# Altium PCB F_300.PcbDoc (part 3 of 3)
Units mil, origin at the board's own origin, x right, y up, seen from the top; angles counter-clockwise.
Board outline 3770 x 3800 mil, 4 copper layers (Top Layer, DGND, VCC, Bottom Layer), stack 30.634 mil thick; 207 components, 290 nets, 1124 pads, 648 vias.
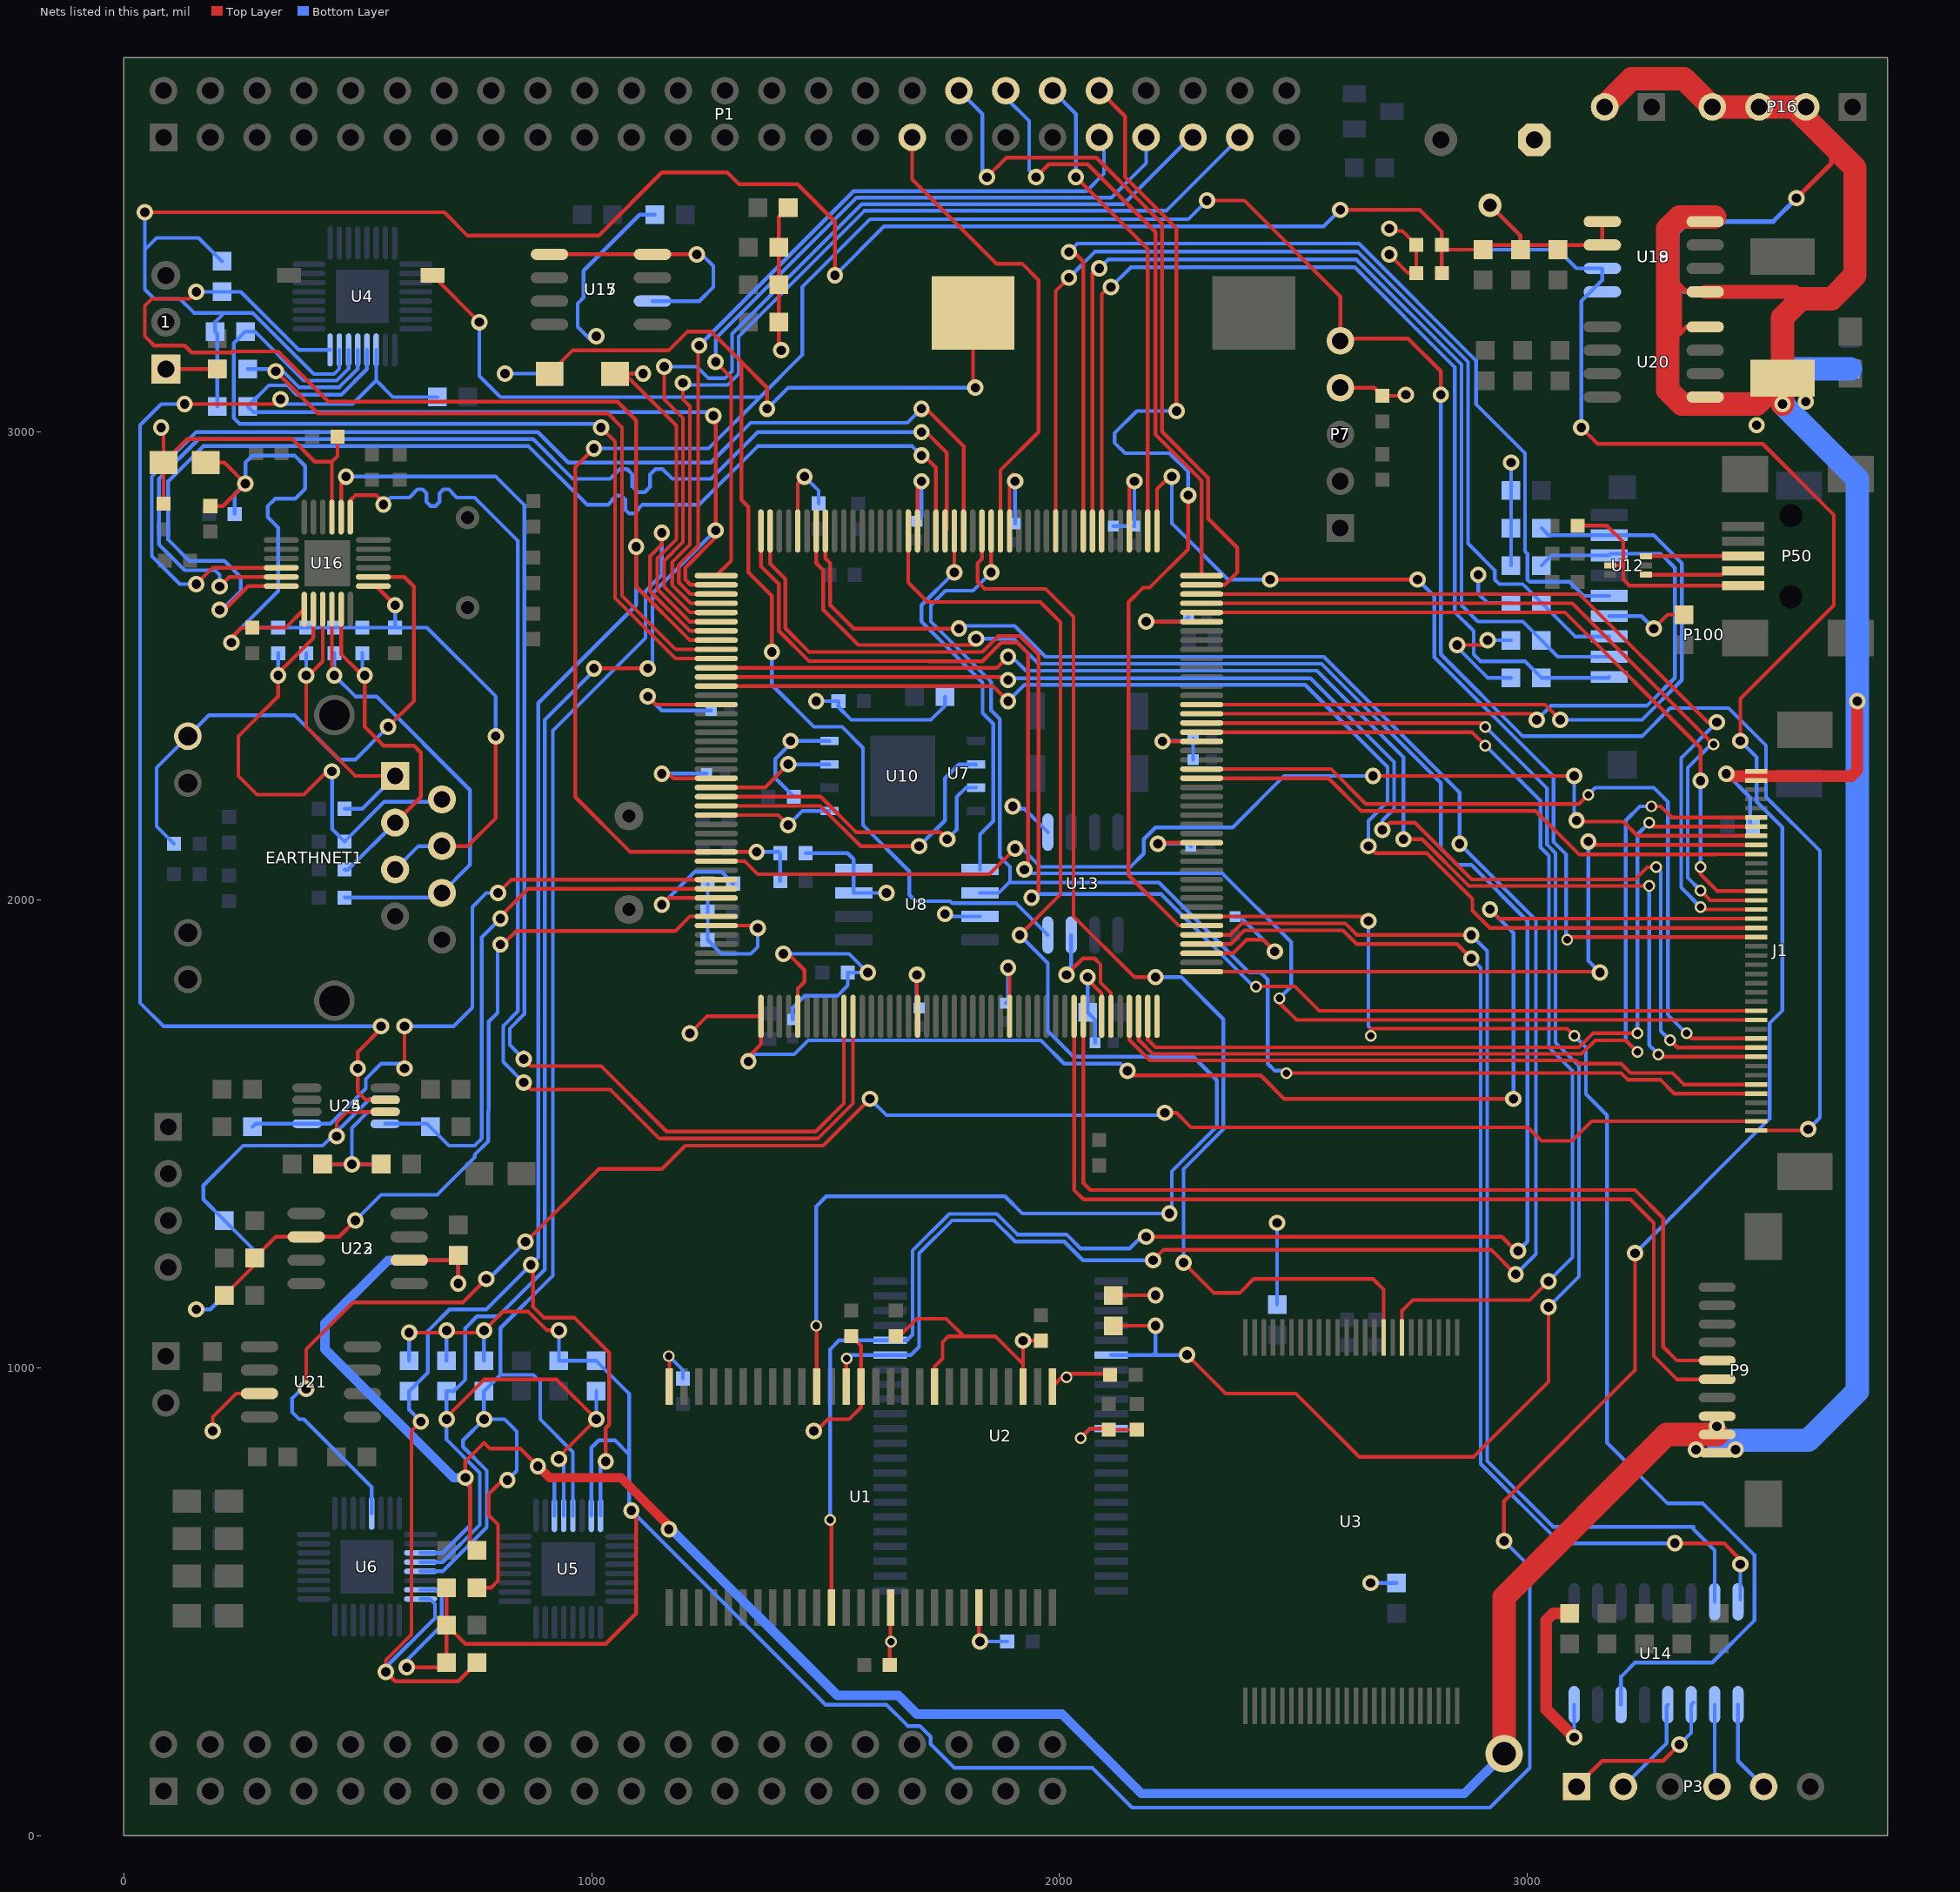
[diagram p5: the nets of this part, all layers, seen from the top]

## Via types
v1: diameter 35, hole 20, Top Layer to Bottom Layer, 496 vias
v2: diameter 25, hole 16, Top Layer to Bottom Layer, 109 vias
v3: diameter 19.68, hole 7.87, Top Layer to Bottom Layer, 31 vias
v4: diameter 120, hole 120, Top Layer to Bottom Layer, 5 vias
v5: diameter 50, hole 28, Top Layer to Bottom Layer, 3 vias
v6: diameter 110, hole 110, Top Layer to Bottom Layer, 2 vias
v7: diameter 38, hole 28, Top Layer to Bottom Layer, 1 vias
v8: diameter 80, hole 50, Top Layer to Bottom Layer, 1 vias

## Nets (pads, with @x,y where several pads share a name; then routed paths per layer and width w, separated by ;. In a path a pad name is that pad's centre, name@x,y a point inside that pad or via, vN(x,y) a via of type N, cw(c..) or ccw(c..) an arc to the next point about the centre after c; other vN are vias at no path point) (continued)
PB10: P9.5 U7.79 | length 2080.2
  Top Layer w8: U7.79@2031.06,1751.3 2031.06,1380 2051.06,1360 3220,1360 3270,1310 3270,1025 3319.5,975.5 P9.5@3405.5,975.5
PB11: P9.6 U7.80 | length 2029.3
  Top Layer w8: U7.80@2050.75,1751.3 2050.75,1395 2065.75,1380 3230,1380 3290,1320 3290,1045 3319.5,1015.5 P9.6@3405.5,1015.5
PB12: U7.92 U14.8 | length 2443.5
  Top Layer w8: U7.92@2303.7,1905.83 2365.83,1905.83 2395,1935 2605.83,1935 2635,1905.83 2849.17,1905.83 v1(2880,1875) ; v1(3315,625) 3420,625 3450,595 3450,580 v1(3455,580)
  Bottom Layer w8: v1(2880,1875) 2900,1855 2900,795 3070,625 v1(3315,625) v1@3305,635 ; U14.8@3455,505 v1(3455,580)
PB13: U7.93 U14.7 | length 2407.7
  Top Layer w8: U7.93@2303.7,1925.51 2365,1925.51 2389.49,1950 2610.63,1950 2635.11,1925.51 v1@2880,1925.51
  Bottom Layer w8: v1(2880,1925) 2914,1891 2914,801 3055,660 3355,660 ; 3355,655 3400,610 U14.7@3400,500
PB14: P1.42 U7.94 | length 2184.2
  Top Layer w8: P1.42@2085,3730 2140,3675 2140,3545 2250,3435 v1(2250,3045) ; 2255,1945.2 2147.5,2052.7 2147.5,2636.39 2178.61,2667.5 2192.5,2667.5 2275,2750 v1(2275,2865)
  Bottom Layer w8: v1(2250,3045) 2165,3045 2117.5,2997.5 2117.5,2977.5 2140,2955 2235,2955 2275,2915 v1(2275,2865)
PB15: U7.95 U14.14 | length 2885
  Top Layer w8: U7.95@2303.7,1964.88 2650.12,1964.88 v1(2660,1955) ; 2665,1725 3085,1725 v2(3100,1710)
  Bottom Layer w8: v1(2660,1955) 2660,1730 2665,1725 ; v2(3100,1710) v2@3103.11,1706.89 ; v2@3103.12,1709.97 v2@3103.11,1706.89 ; U14.14@3200,280 3200,340 3230,370 3395.2,370 3485,459.8 3485,600 3375,710 3300,710 3170,840 3170,1540 3125,1585 3125,1685 v2@3103.11,1706.89
  other v2: 2665,1710
PC0: J1.8 U7.32 | length 2472.3
  Top Layer w8: U7.32@1266.3,2082.99 1327.01,2082.99 1355,2055 1850,2055 v1(1905,2110) ; v1(2670,2265) v1@3105,2265 ; v1(3105,2170) 3107.5,2167.5 3204.7,2167.5 3235,2137.2 J1.8@3489,2137.2
  Bottom Layer w8: v1(1905,2110) 1920,2110 1959,2071 2151.8,2071 2180,2099.2 2180,2130 2205,2155 2370,2155 2480,2265 v1(2670,2265) ; v1@3100,2255 3100,2175 v1(3105,2170)
  other v1: 3100,2265
PC2: R81.2 U7.34 U24.5 | length 1421.9
  Top Layer w8: v1(600,1640) v1(600,1730) ; v1(800,2015) 828.62,2043.62 U7.34@1266.3,2043.62
  Bottom Layer w8: R81.2@275,1515 281.61,1521.61 U24.5@391.34,1521.61 441.61,1521.61 517.17,1597.17 517.17,1617.17 550,1650 605,1650 600,1645 v1(600,1640) ; v1(600,1730) 705,1730 745,1770 745,1985 775,2015 v1(800,2015)
PC3: R80.1 U7.35 U24.4 | length 1209.1
  Top Layer w8: v1(805,1960) 805,1965 863.94,2023.94 U7.35@1266.3,2023.94
  Bottom Layer w8: U24.4@558.66,1521.61 648.39,1521.61 R80.1@655,1515 695,1475 750,1475 765,1490 765,1920 v1(805,1960)
PC4: U7.54 U16.8 | length 2680.4
  Top Layer w8: U16.8@464.53,2818.43 464.53,2889.53 475,2900 v1(475,2905) ; v1(855,1660) 870,1645 1020.2,1645 1160,1505.2 1478.89,1505.2 1538.94,1565.25 U7.54@1538.94,1751.3
  Bottom Layer w8: v1(475,2905) 795,2905 856,2844 856,1756 825,1725 825,1690 v1(855,1660) v1@855,1675
PC5: U7.55 U16.7 | length 2680.4
  Top Layer w8: U16.7@484.21,2818.43 484.21,2854.21 495,2865 540,2865 555,2850 v1(555,2845) ; v1(855,1610) 870,1595 1040,1595 1145,1490 1483.49,1490 1558.62,1565.13 U7.55@1558.62,1751.3
  Bottom Layer w8: v1(555,2845) 570,2860 605,2860 610.6,2860 619,2868.4 619,2869.36 627.4,2877.76 638.6,2877.76 647,2869.36 647,2860 647,2850.64 655.4,2842.24 666.6,2842.24 675,2850.64 675,2860 675,2869.36 683.4,2877.76 694.6,2877.76 703,2869.36 703,2868.4 711.4,2860 750,2860 842,2768 842,1761.8 811,1730.8 811,1654 v1(855,1610)
PC6: U3.7 U7.115 | length 2257.4
  Top Layer w8: U7.115@2303.7,2358.58 2881.42,2358.58 v2(2910,2330) ; U3.7@2731.89,1065 2731.89,1121.89 2755,1145 3005,1145 v1(3045,1185)
  Bottom Layer w8: v2(2910,2330) 3028,2212 3028,2112.4 3046,2094.4 3046,1685 3096,1635 3096,1236 v1(3045,1185)
PC7: R1.1 U2.6 U7.116 | length 3365
  Top Layer w8: R1.1@2115,1090 v1(2205,1090) ; v1(2272.54,1027.54) 2355.09,945 2505,945 2640,810 2885,810 3045,970 v1(3045,1130) ; U7.116@2303.7,2378.27 2901.73,2378.27 v2(2910,2370)
  Bottom Layer w8: U2.6@2110.35,1027.54 2200,1027.54 ; v1(2205,1090) 2205,1032.54 2200,1027.54 ; v1(2272.54,1027.54) 2200,1027.54 ; v2(2910,2370) 3042,2238 3042,2118.2 3060,2100.2 3060,1695 3110,1645 3110,1195 v1(3045,1130)
PC8: P100.7 R43.1 U7.117 | length 1596.9
  Top Layer w8: U7.117@2303.7,2397.95 3007.05,2397.95 v1(3020,2385)
  Bottom Layer w8: v1(3020,2385) 3050,2415 3255.2,2415 3315.1,2474.9 3315.1,2709.9 3285,2740 3178.47,2740 P100.7@3175,2736.53 3051.54,2736.53 R43.1@3030,2715
PC9: P100.8 R44.1 U7.118 | length 1656.1
  Top Layer w8: U7.118@2303.7,2417.64 3037.36,2417.64 v1(3070,2385)
  Bottom Layer w8: R44.1@3030,2795 3045.16,2779.84 P100.8@3175,2779.84 3270.16,2779.84 3330,2720 3330,2470 3245,2385 v1(3070,2385)
PC10: P100.1 R39.2 U7.139 | length 2322.3
  Top Layer w8: U7.139@2090.12,2788.7 2090.12,3295.12 2110,3315 v1(2110,3310)
  Bottom Layer w8: v1(2110,3310) 2152.5,3352.5 2631.1,3352.5 2844.5,3139.1 2844.5,2615.5 2885,2575 2885,2525 2900,2510 2995,2510 R39.2@3030,2475 3173.31,2475 P100.1@3175,2476.69
PC11: P100.2 R38.2 U7.140 | length 2321.1
  Top Layer w8: U7.140@2070.43,2788.7 2070.43,3340.43 2080,3350 v1(2085,3350)
  Bottom Layer w8: v1(2085,3350) 2104,3369 2634.4,3369 2859,3144.4 2859,2630 2894,2595 2990,2595 R38.2@3030,2555 3065,2520 P100.2@3175,2520
PC12: P100.5 U7.141 | length 2313.1
  Top Layer w8: v1(2020,3385) 2020,3395 2050.75,3364.25 U7.141@2050.75,2788.7
  Bottom Layer w8: v1(2020,3385) 2038,3403 2640,3403 2890,3153 2890,3060 2995,2955 2995,2745 3000,2740 3000,2685 3005,2680 3090,2680 3120.08,2649.92 P100.5@3175,2649.92
PC13: R10.1 R11.1 R21.1 U4.32 U5.32 U6.32 U7.8 | length 6008.3
  Top Layer w8: v1(155,3300) 140,3285 60,3285 45,3270 45,3205 65,3185 130,3185 145,3170 170,3170 230,3170 232.5,3172.5 330,3172.5 437.5,3065 1055,3065 1095,3025 v1(1095,2755) 1095.09,2754.91 1095.09,2670 1209.66,2555.43 U7.8@1266.3,2555.43 ; v1(635,885) 615,865 615,430 560,375 v1(560,350) 580,330 715,330 R21.1@755,370 ; v1@875,1220 875,1130 897.5,1107.5 962.5,1107.5 1037.5,1032.5 1037.5,878.61 1030,871.11 v1(1030,800)
  Bottom Layer w8: v1(155,3300) R10.1@210,3300 250,3300 374.25,3175.75 U4.32@441.02,3175.75 ; v1@555,355 665,465 665,495 653.98,506.02 U6.32@634.25,506.02 ; v1(635,885) 610,910 R11.1@610,950 650,990 650,1078.89 696.11,1125 775,1125 v1(870,1220) 886,1236 886,2421 1095,2630 v1(1095,2755) ; U5.32@1018.98,684.25 1018.98,788.98 v1(1030,800)
PC14: R4.1 U4.29 U7.9 | length 1706.2
  Top Layer w8: v1(325,3130) 415,3040 1035,3040 1065,3010 1065,2650.2 1179.45,2535.75 U7.9@1266.3,2535.75
  Bottom Layer w8: R4.1@265,3135 335,3135 374,3096 460.8,3096 500.08,3135.28 U4.29@500.08,3175.75
PC15: R5.1 U4.30 U7.10 | length 1959.7
  Top Layer w8: v1(1020,3010) 1050,2980 1050,2645.4 1179.34,2516.06 U7.10@1266.3,2516.06
  Bottom Layer w8: U4.30@480.39,3175.75 480.39,3135.39 455,3110 385,3110 280,3215 R5.1@260,3215 235,3190 235,3030 247.5,3017.5 v1@1032.5,3017.5
PD2: P100.3 R37.2 U7.144 | length 2310.8
  Top Layer w8: U7.144@1991.69,2788.7 1991.69,3301.69 v1(2020,3330)
  Bottom Layer w8: v1(2020,3330) 2075.6,3385.6 2637.6,3385.6 2873,3150.2 2873,2762 2930,2705 2930,2685 2940,2675 2990,2675 R37.2@3030,2635 3101.69,2563.31 P100.3@3175,2563.31
PD6: P1.33 U7.150 | length 1019.1
  Top Layer w8: P1.33@1685,3630 1685,3540 1865,3360 1920,3360 1955,3325 1955,3000 1873.58,2918.58 U7.150@1873.58,2788.7
PD7: J1.36 U7.151 U8.2 | length 2869.6
  Top Layer w8: v1(1853.9,2700) U7.151@1853.9,2788.7 ; v2(2485,1630) 3200.4,1630 3214.4,1616 3284,1616 3313.98,1586.02 J1.36@3489,1586.02
  Bottom Layer w8: U8.2@1830,2014.94 1869.94,2014.94 1894,2039 ; v1(1853.9,2700) 1815,2661.1 1756.1,2661.1 1725,2630 1725,2595 1853.9,2466.1 1853.9,2405.1 1872.5,2386.5 1872.5,2092.5 1894,2071 1894,2039 ; v2(2485,1630) 2480,1635 2460,1635 2445,1650 2445,1830 2430,1845 2405,1845 2212.5,2037.5 1895.5,2037.5 1894,2039
PE0: U1.15 U2.39 U7.169 | length 4599.8
  Top Layer w8: U7.169@1499.57,2788.7 1499.57,2730.43 1510,2720 1510,2630 1560,2580 v1(1785,2580) ; U1.15@1544.05,960 1544.05,1024.05 1545,1025 v2(1545,1020) ; v1(2200,1230) 2222.5,1252.5 2922.5,1252.5 v1(2975,1200)
  Bottom Layer w8: v2(1545,1020) 1552.54,1027.54 U2.39@1637.91,1027.54 1682.54,1027.54 1700,1045 1700,1244.8 1770.2,1315 1860,1315 1905,1270 2010,1270 2050,1230 v1(2200,1230) ; v1(1785,2580) 1791.01,2586.01 1903.99,2586.01 1970,2520 2564.8,2520 2855,2229.8 v1(2855,2120) 3018,1957 3018,1243 v1(2975,1200)
PE1: U1.39 U2.40 U7.170 | length 5056
  Top Layer w8: U7.170@1479.88,2788.7 1479.88,2720.12 1495,2705 1495,2620 1570,2545 v1@1815,2545 ; v2(1510,675) 1512.56,672.44 U1.39@1512.56,487.56 ; v1(2185,1280) 2945,1280 2975,1250 v1(2980,1250)
  Bottom Layer w8: v2(1510,675) 1510,1040 1529.04,1059.04 U2.40@1637.91,1059.04 1674.04,1059.04 1686,1071 1686,1250.6 1764.4,1329 1866,1329 1910,1285 2014.8,1285 2044.8,1255 2150,1255 2180,1285 v1(2185,1280) ; v1(1821.49,2558.51) 1901.49,2558.51 1955,2505 2560,2505 2815,2250 2815,2110 2850,2075 2880.2,2075 3000.1,1955.1 3000.1,1270.1 v1(2980,1250)
PE2: P1.43 U7.1 | length 1664
  Top Layer w8: v1(1265,3150) 1298.07,3116.93 1298.07,2725 U7.1@1266.3,2693.23
  Bottom Layer w8: v1(1265,3150) 1265,3200 1566,3501 2111,3501 2185,3575 P1.43@2185,3630
PE3: R12.1 R13.2 R22.1 U4.28 U5.28 U6.28 U7.2 | length 5158.6
  Top Layer w8: v1(690,890) 690,895 770,975 925,975 v1(1010,890) 930,810 v1(930,805) ; v1(1005,2495) v1(1120,2495) ; v1(1260,3035) 1265,3030 v1(1265,2790) 1265,2775 1200,2710 1200,2685 1211.46,2673.54 U7.2@1266.3,2673.54
  Bottom Layer w8: U4.28@519.76,3175.75 519.76,3134.76 465,3080 370,3080 350,3100 310,3100 R13.2@265,3055 277.5,3042.5 1252.5,3042.5 v1(1260,3035) ; U6.28@634.25,584.76 681.57,584.76 760.91,664.1 760.91,775.41 690,846.31 v1(690,890) R12.1@690,950 705,950 730,975 730,1085 755,1110 800,1110 900,1210 900,2385 1007.5,2492.5 v1(1005,2495) ; v1(930,805) 940.24,794.76 U5.28@940.24,684.25 ; v1(1010,890) 1010,895 R22.1@1010,950 ; v1(1120,2495) 1130,2495 1130,2655 v1(1265,2790)
PE4: P1.41 U7.3 | length 1723.7
  Top Layer w8: v1(1230,3185) 1230,3190 1227.6,3187.6 1227.6,2757.4 1186,2715.8 1186,2679.2 1211.34,2653.86 U7.3@1266.3,2653.86
  Bottom Layer w8: v1(1230,3185) 1560,3515 2057.5,3515 2095,3552.5 2095,3620 P1.41@2085,3630
PE5: P1.47 U7.4 | length 2021.7
  Top Layer w8: v1(1195,3105) 1195,3070 1210,3055 1210,2759.6 1172,2721.6 1172,2673.4 1211.23,2634.17 U7.4@1266.3,2634.17
  Bottom Layer w8: v1(1195,3105) 1199,3101 1290.8,3101 1314,3124.2 1314,3204.2 1582.8,3473 2228,3473 P1.47@2385,3630
PE6: P1.45 U7.5 | length 2038.3
  Top Layer w8: v1(1155,3140) 1155,3070 1195,3030 1195,2765 1155,2725 1155,2669.49 1210,2614.49 U7.5@1266.3,2614.49
  Bottom Layer w8: v1(1155,3140) 1225,3140 1250,3115 1285,3115 1300,3130 1300,3210 1577,3487 2136.6,3487 2279.6,3630 P1.45@2285,3630
PG6: J1.10 U7.110 | length 1252.8
  Top Layer w8: U7.110@2303.7,2260.16 2575,2260.16 2645.16,2190 3017.5,2190 3110,2097.5 3404.67,2097.5 3405,2097.83 J1.10@3489,2097.83
PG7: J1.30 U7.111 | length 1719.3
  Top Layer w8: U7.111@2303.7,2279.84 2580,2279.84 2654.84,2205 3110,2205 v2(3130,2225) ; v2(3340,1715) 3350.87,1704.13 J1.30@3489,1704.13
  Bottom Layer w8: v2(3130,2225) 3145,2240 3270,2240 3300,2210 3300,1755 v2(3340,1715)
PG9: U3.9 U7.152 | length 2533.9
  Top Layer w8: U7.152@1834.21,2788.7 1834.21,2729.21 1825,2720 1825,2680 1840,2665 1970.2,2665 2030,2605.2 2030,1965 2160,1835 v1(2205,1835) ; v1(2265,1225) 2330,1160 2385,1160 2415,1190 2670,1190 2692.52,1167.48 U3.9@2692.52,1065
  Bottom Layer w8: v1(2205,1835) 2260.2,1835 2350.1,1745.1 2350.1,1510.1 2265,1425 v1(2265,1225)
PG11: U7.154 U16.16 | length 2553.4
  Top Layer w8: v1(155,2675) 190.16,2710.16 U16.16@336.57,2710.16 ; v1(1705,3050) 1710,3055 1794.84,2970.16 U7.154@1794.84,2788.7
  Bottom Layer w8: v1(155,2675) 120,2675 60,2735 60,2905 155,3000 885,3000 950,2935 1255,2935 1340,3020 1675,3020 v1(1705,3050)
PG12: U7.155 U8.1 | length 833.1
  Top Layer w8: v1@1775.16,2695 U7.155@1775.16,2788.7
  Bottom Layer w8: v1(1775,2700) 1705,2630 1705,2595 1835.5,2464.5 1835.5,2399.5 1858.5,2376.5 1858.5,2168.5 1830,2140 U8.1@1830,2065
PG13: U7.156 U16.17 | length 2548
  Top Layer w8: v1(205,2670) 225.47,2690.47 U16.17@336.57,2690.47 ; v1(1705,3000) 1705,3010 1710,3005 1759,2956 1759,2792.23 U7.156@1755.47,2788.7
  Bottom Layer w8: v1(205,2670) 205,2695 195,2705 130,2705 75,2760 75,2900 160,2985 875,2985 960,2900 1039.4,2900 1060.4,2921 1075.6,2921 1087,2909.6 1087,2883.2 1098.4,2871.8 1113.6,2871.8 1125,2883.2 1125,2909.6 1136.4,2921 1151.6,2921 1172.6,2900 1255,2900 1355,3000 v1(1705,3000)
PG14: U7.157 U16.18 | length 2548
  Top Layer w8: v1(205,2620) 205,2615 210,2615 265.79,2670.79 U16.18@336.57,2670.79 ; v1(1705,2950) 1710,2950 1735.79,2924.21 U7.157@1735.79,2788.7
  Bottom Layer w8: v1(205,2620) 205,2615 250,2660 250,2690 215,2725 140,2725 95,2770 95,2895 170,2970 865,2970 990,2845 1035.6,2845 1044,2853.4 1044,2855.65 1052.4,2864.05 1063.6,2864.05 1072,2855.65 1072,2834.35 1080.4,2825.95 1091.6,2825.95 1100,2834.35 1100,2836.6 1108.4,2845 1230,2845 1355,2970 1685,2970 v1(1705,2950)
PG15: U1.17 U7.160 | length 3301.2
  Top Layer w8: v2(1480,1090) 1481.06,1088.94 U1.17@1481.06,960 ; U7.160@1676.73,2788.7 1676.73,2678.27 1718,2637 1958.6,2637 2002,2593.6 2002,2012 v1(1915,1925)
  Bottom Layer w8: v2(1480,1090) 1480,1345 1501.5,1366.5 1883.5,1366.5 1920,1330 v1(2235,1330) 2240,1335 2240,1419.8 2336.1,1515.9 2336.1,1615 2286.1,1665 2030,1665 1975,1720 1975,1865 v1(1915,1925)
PH4: J1.17 U7.45 | length 3003.8
  Top Layer w8: v1(1210,1715) 1246.3,1751.3 U7.45@1361.77,1751.3 1361.77,1691.77 1325,1655 v1(1335,1655) ; v1(2145,1635) 2155,1625 2430,1625 2480,1575 v1(2970,1575) ; v1(2920,1980) 2940,1960 2985,1960 2985.04,1960.04 J1.17@3489,1960.04
  Bottom Layer w8: v1@1340,1650 v1(1335,1655) 1350,1670 1432.76,1670 1462.76,1700 1960,1700 2010,1650 2130,1650 v1(2145,1635) ; v1(2920,1980) 2970,1930 v1(2970,1575)
PH6: U7.83 U13.7 | length 301.8
  Top Layer w8: v1(2015,1840) 2050,1875 2075,1875 2087.5,1862.5 2087.5,1823.61 2109.8,1801.31 U7.83@2109.8,1751.3
  Bottom Layer w8: v1(2015,1840) 2015,1850 2025,1860 U13.7@2025,1925
PH8: J1.35 U7.85 | length 1429.7
  Top Layer w8: U7.85@2149.17,1751.3 2149.17,1700.83 2193,1657 3103,1657 3110,1650 3200.2,1650 3220.2,1630 3310,1630 3334.29,1605.71 J1.35@3489,1605.71
PH9: J1.6 U7.86 | length 1957.5
  Top Layer w8: U7.86@2168.86,1751.3 2168.86,1701.34 2199.2,1671 3115.8,1671 3144.8,1700 3210,1700 v2(3235,1675) ; v2(3265,2200) 3285,2200 3308.43,2176.57 J1.6@3489,2176.57
  Bottom Layer w8: v2(3235,1675) 3210,1700 3210,2170 3240,2200 v2(3265,2200)
PH10: J1.7 U7.87 | length 1808.3
  Top Layer w8: U7.87@2188.54,1751.3 2188.54,1701.46 2205,1685 3110,1685 3140,1715 v2(3235,1715) ; v2(3260,2165) 3268.11,2156.89 J1.7@3489,2156.89
  Bottom Layer w8: v2(3235,1715) 3235,2140 v2(3260,2165)
PH11: U7.88
PH12: J1.9 U7.89 | length 1504.5
  Top Layer w8: U7.89@2303.7,1846.77 3153.23,1846.77 v1(3155,1845) ; v1(3130,2125) 3137.48,2117.52 J1.9@3489,2117.52
  Bottom Layer w8: v1(3130,2125) 3130,1870 v1(3155,1845)
PH13: J1.14 U7.128 | length 1590.1
  Top Layer w8: U7.128@2303.7,2614.49 3080.51,2614.49 3370,2325 v1(3370,2255) ; v2(3370,2070) 3370,2055 3405.91,2019.09 J1.14@3489,2019.09
  Bottom Layer w8: v2(3370,2070) v1(3370,2255)
PH14: J1.15 U7.129 | length 1695.9
  Top Layer w8: U7.129@2303.7,2634.17 3095.83,2634.17 v2(3397.5,2332.5) ; v2(3370,2020) 3390.59,1999.41 J1.15@3489,1999.41
  Bottom Layer w8: v2(3370,2020) 3342.5,2047.5 3342.5,2282.5 3392.5,2332.5 v2(3397.5,2332.5)
PH15: J1.16 U7.130 | length 1783.3
  Top Layer w8: U7.130@2303.7,2653.86 3111.14,2653.86 3385,2380 v1(3405,2380) ; v2(3370,1985) 3375.28,1979.72 J1.16@3489,1979.72
  Bottom Layer w8: v2(3370,1985) 3328.5,2026.5 3328.5,2303.5 v1(3405,2380) ; v1@3402.5,2382.5 v1@3405,2385
PI0: P1.36 U7.131 | length 1559.2
  Top Layer w8: v1(1845,3545) 1886.5,3586.5 2078.5,3586.5 2219,3446 2219,3000.8 2317.7,2902.1 2317.7,2815 2380,2752.7 2380,2700 2353.54,2673.54 U7.131@2303.7,2673.54
  Bottom Layer w8: P1.36@1785,3730 1835,3680 1835,3555 v1(1845,3545)
PI1: P1.38 U7.132 | length 1313.5
  Top Layer w8: v1(1950,3545) 1977.5,3572.5 2060,3572.5 2205,3427.5 2205,2995 2303.7,2896.3 U7.132@2303.7,2693.23
  Bottom Layer w8: P1.38@1885,3730 1885,3715 1935,3665 1935,3560 v1(1950,3545)
PI2: J1.19 U7.133 | length 2113.6
  Top Layer w8: U7.133@2208.23,2788.7 2208.23,2878.23 2235,2905 v1(2240,2905) ; v1(2450,2685) v1(2765,2685) ; v2@3085,1920.67 J1.19@3489,1920.67
  Bottom Layer w8: v1(2240,2905) 2240,2805 2360,2685 v1(2450,2685) ; v1(2765,2685) 2801,2649 2801,2519 3056,2264 3056,2124 3082.5,2097.5 3082.5,1917.5 v2(3085,1915)
PI3: P1.40 U7.134 | length 1025.6
  Top Layer w8: v1(2035,3545) 2188.54,3391.46 U7.134@2188.54,2788.7
  Bottom Layer w8: P1.40@1985,3730 2035,3680 v1(2035,3545)
PI6: J1.27 U7.175 | length 2995.2
  Top Layer w8: U7.175@1381.46,2788.7 1381.46,2718.54 1414,2686 1414,2580.8 1464.8,2530 1835.2,2530 1869.2,2564 1916,2564 1955,2525 1955,2020 v1(1940,2005) ; v2(2420,1815) 2503.19,1815 2555,1763.19 J1.27@3489,1763.19
  Bottom Layer w8: v1(1940,2005) 1947.5,2012.5 2217.3,2012.5 2414.8,1815 v2(2420,1815)
PI7: J1.28 U7.176 | length 3089.1
  Top Layer w8: U7.176@1361.77,2788.7 1361.77,2713.23 1400,2675 1400,2575 1464.62,2510.38 1720.8,2510.38 1721.18,2510 1835,2510 1875,2550 1910,2550 1932.5,2527.5 1932.5,2072.5 v1(1925,2065) ; v2(2470,1790) 2470,1780 2506.5,1743.5 J1.28@3489,1743.5
  Bottom Layer w8: v1(1925,2065) 1933,2057 2348,2057 2495,1910 2495,1815 v2(2470,1790)
PI8: R7.1 R14.1 U5.29 U6.29 U7.7 | length 3715.5
  Top Layer w8: R14.1@755,530 785,530 800,545 800,665 780,685 780,730 815,765 v1(820,760) ; v1(1150,2785) 1150,2759.6 1125.4,2735 1125,2735 1125,2659.89 1209.77,2575.12 U7.7@1266.3,2575.12
  Bottom Layer w8: U6.29@634.25,565.08 681.69,565.08 775.8,659.2 775.8,780.3 725,831.11 725,845 v1(770,890) ; v1(820,760) 840,780 840,863.89 813.89,890 v1(770,890) ; U5.29@959.92,684.25 959.92,820.08 890,890 890,970 875,985 805,985 ; v1(1150,2785) 1150,2695 1115,2660 1115,2560 917,2362 917,1197 805,1085 805,985 ; v1(770,890) R7.1@770,950 805,985
PI9: J1.32 U7.11 | length 2886.6
  Top Layer w8: U7.11@1266.3,2496.38 1680,2496.38 1680.38,2496 1866,2496 v1(1890,2520) ; v1(2735,2130) 2775,2130 2875,2030 v2(3260,2030) ; v2@3280,1664.76 J1.32@3489,1664.76
  Bottom Layer w8: v1(1890,2520) 1898,2520 1928,2490 2550,2490 2735,2305 v1(2735,2130) ; v2(3260,2030) 3260,1690 v2(3280,1670)
PI10: J1.31 U7.12 | length 2913.6
  Top Layer w8: U7.12@1266.3,2476.69 1883.31,2476.69 v1(1890,2470) ; v1@2690,2144 v1(2690,2150) 2705,2165 2760,2165 2881,2044 3230,2044 3256,2070 v2(3275,2070) ; v2(3305,1700) 3320.55,1684.45 J1.31@3489,1684.45
  Bottom Layer w8: v1(1890,2470) 1894,2474 2536,2474 2715,2295 2715,2195 2690,2170 v1(2690,2150) ; v2(3275,2070) 3285,2060 3285,1720 v2(3305,1700)
PI11: J1.18 U7.13 | length 2637.9
  Top Layer w8: U7.13@1266.3,2457.01 1857.99,2457.01 v1(1890,2425) ; v1(2660,2115) 2675,2100 2785,2100 2882.5,2002.5 2882.5,1977.5 2919.65,1940.35 J1.18@3489,1940.35
  Bottom Layer w8: v1(1890,2425) 1925,2460 2525,2460 2701,2284 2701,2210 2661,2170 2660,2170 v1(2660,2115)
QSPI_BK1_IO0: U7.27 U10.5 | length 263.5
  Top Layer w8: U7.27@1266.3,2181.42 1398.58,2181.42 v1(1420,2160)
  Bottom Layer w8: v1(1420,2160) 1450,2190 U10.5@1508.5,2190
QSPI_BK1_IO1: U7.26 U10.2 | length 716.1
  Top Layer w8: U7.26@1266.3,2201.1 1488.9,2201.1 1575,2115 v1(1700,2115)
  Bottom Layer w8: v1(1700,2115) 1755,2170 1755,2260 1785,2290 U10.2@1821.5,2290
QSPI_BK1_IO2: U7.25 U10.3 | length 679.4
  Top Layer w8: U7.25@1266.3,2220.79 1489.21,2220.79 1565,2145 1745,2145 v1(1760,2130)
  Bottom Layer w8: v1(1760,2130) 1780,2150 1780,2220 1800,2240 U10.3@1821.5,2240
QSPI_BK1_IO3: U7.24 U10.7 | length 262.7
  Top Layer w8: U7.24@1266.3,2240.47 1370.47,2240.47 v1(1420,2290)
  Bottom Layer w8: v1(1420,2290) U10.7@1508.5,2290
RESET: C13.1 J1.40 P7.5 R27.1 RST2.1 U7.31 | length 6928.3
  Top Layer w8: RST2.1@660,3335 v1(760,3235) ; v1(1005,2965) 965,2925 965,2220 1082.32,2102.68 U7.31@1266.3,2102.68 v1(1352.68,2102.68) ; v1(2315,3495) 2395,3495 2600,3290 P7.5@2600,3200 ; P7.5@2600,3195 P7.5@2600,3200 ; v1(2815,3080) 2815,3130 2745,3200 P7.5@2600,3200 ; J1.40@3489,1507.28 3597.28,1507.28 v1(3600,1510)
  Bottom Layer w8: v1(760,3235) 760,3120 805,3075 1360,3075 ; v1(1005,2965) 1250,2965 1360,3075 ; v1(1352.68,2102.68) 1400.32,2102.68 R27.1@1403,2100 C13.1@1403,2040 ; v1(2315,3495) 2275,3455 1595,3455 1450,3310 1450,3165 1360,3075 ; v1(2815,3080) 2815,2525 2990,2350 3245,2350 3305,2410 3430,2410 3510,2330 3510,2220 3625,2105 3625,1535 v1(3600,1510)
RX1: P3.2 U14.12 | length 214.3
  Bottom Layer w8: P3.2@3205,105 3297.5,197.5 3297.5,277.5 U14.12@3300,280
RX5: P3.5 U14.9 | length 197.8
  Bottom Layer w8: U14.9@3450,280 3450,160 P3.5@3505,105
SPEED_LED: EARTHNET1.9 R57.2 U16.2 | length 1206
  Top Layer w8: U16.2@533.43,2690.47 599.53,2690.47 620,2670 620,2425 v1(565,2370)
  Bottom Layer w8: R57.2@107.5,2119.94 70,2157.44 70,2282.76 EARTHNET1.9@137.09,2349.84 182.24,2395 365,2395 460,2300 495,2300 v1(565,2370)
T_OPEN: J1.39 U6.21 | length 3831.2
  Top Layer w8: v1(390,955) 390,1040 490,1140 725,1140 v1(775,1190) ; v1(858.5,1269.61) 859.61,1269.61 1015,1425 1150,1425 1200,1475 1495,1475 v1(1595,1575) ; v1(2225,1545) 2250,1545 2281,1514 3001,1514 3030,1485 3095,1485 3136.97,1526.97 J1.39@3489,1526.97
  Bottom Layer w8: v1(390,955) 385,960 360,935 360,905 375,890 385,890 529.92,745.08 U6.21@529.92,689.09 ; v1(775,1190) 780,1190 859.61,1269.61 v1(858.5,1269.61) ; v1(1595,1575) 1630,1540 2220,1540 v1(2225,1545)
TPRX+: C48.1 EARTHNET1.3 R49.2 U16.23 | length 789.8
  Top Layer w8: U16.23@464.53,2621.57 464.53,2525.47 500,2490 505,2490 v1(515,2480) 515,2370 555,2330 620,2330 635,2315 635,2220.2 EARTHNET1.3@580,2165.2
  Bottom Layer w8: C48.1@472,2065 479.8,2065 EARTHNET1.3@580,2165.2 ; R49.2@510.06,2527.5 510.06,2484.94 v1(515,2480)
TPRX-: C49.1 EARTHNET1.6 R50.2 U16.22 | length 1039.6
  Top Layer w8: U16.22@444.84,2621.57 444.84,2485.16 v1(450,2480)
  Bottom Layer w8: R50.2@450.06,2527.5 450,2527.44 v1(450,2480) 495,2435 540,2435 740,2235 740,2075.2 EARTHNET1.6@680,2015.2 670,2005.2 472.2,2005.2 C49.1@472,2005
TPTX+: C46.1 EARTHNET1.1 R47.2 U16.21 | length 687.1
  Top Layer w8: U16.21@425.16,2621.57 425.16,2510.16 395,2480 v1(390,2480) 390,2370 494.8,2265.2 EARTHNET1.1@580,2265.2
  Bottom Layer w8: v1(390,2480) 390,2527.44 R47.2@390.06,2527.5 ; C46.1@472,2195 509.8,2195 EARTHNET1.1@580,2265.2
TPTX-: C47.1 EARTHNET1.2 R48.2 U16.20 | length 1148.7
  Top Layer w8: U16.20@405.47,2621.57 405.47,2560 330,2484.53 v1(330,2480) 330,2435 245,2350 245,2265 285,2225 385,2225 445,2285 v1(445,2275)
  Bottom Layer w8: v1(330,2480) 330,2527.44 R48.2@330.06,2527.5 ; v1(445,2275) 445,2152 C47.1@472,2125 557,2210 674.8,2210 EARTHNET1.2@680,2215.2 EARTHNET1.2@680,2195
TX1: P3.1 U14.11 | length 359.7
  Top Layer w8: P3.1@3105,105 3160,160 3290,160 v1(3325,195)
  Bottom Layer w8: v1(3325,195) 3350,220 U14.11@3350,280 U14.11@3355,285
TX5: P3.4 U14.10 | length 187.1
  Bottom Layer w8: U14.10@3400,280 3400,110 P3.4@3405,105 P3.4@3405,115
USB_D+: P50.3 U12.3 | length 207.7
  Top Layer w8: U12.3@3253.39,2734.69 3253.7,2735 P50.3@3460.94,2735
USB_D-: P50.2 U12.1 | length 210.9
  Top Layer w8: U12.1@3253.39,2695.32 3415,2695.32 3423.19,2703.5 P50.2@3460.94,2703.5
USB_VCC: P50.1 R36.2 U12.5 | length 485.8
  Top Layer w8: R36.2@3107.5,2799.94 3170.06,2799.94 3205,2765 3205,2725 ; U12.5@3176.61,2715 3195,2715 3205,2725 ; P50.1@3460.94,2672.01 3217.99,2672.01 3205,2685 3205,2725
VBAT: D1.2 D2.2 U7.6 | length 803.4
  Top Layer w8: D1.2@1050,3125 D1.2@1070,3125 ; v1(1110,3125) D1.2@1070,3125 ; U7.6@1266.3,2594.8 1209.89,2594.8 1140.2,2664.49 1140.2,2730 1181,2770.8 1181,3014 D1.2@1070,3125
  Bottom Layer w8: D2.2@1045,3125 v1(1110,3125)
VBAT3V: BAT1.1 D1.1 U13.8 | length 2887.2
  Top Layer w8: D1.1@910,3125 960,3175 1165,3175 1205,3215 1255,3215 1320,3150 ; v1(1375,3050) 1375,3095 1320,3150 ; v1(1385,2530) 1385,2650 1335,2700 1335,2840 1320,2855 1320,3150 ; BAT1.1@1815,3255 1815,3095 1820,3090 v1(1820,3095)
  Bottom Layer w8: v1(1375,3050) 1420,3095 v1(1820,3095) ; v1(1385,2530) 1385,2460 1475,2370 1535,2370 1580,2325 1580,2160 1679,2061 1679,2011 1692.5,1997.5 1766.39,1997.5 1770.95,1992.94 1907.06,1992.94 U13.8@1975,1925
VCC3.3: C60.1 C61.1 C62.1 C64.1 C65.1 C66.1 R4.2 R5.2 R7.2 R8.2 R10.2 R11.2 R12.2 R13.1 R14.2 R15.2 R21.2 R22.2 R25.1 R28.1 U4.31 U5.31 U6.31 U18.1 U18.2 U19.1 U19.2 | length 13914.3
  Top Layer w8: v1(45,3470) 685,3470 735,3420 1015,3420 1150,3555 1290,3555 1315,3530 1440,3530 1520,3450 v1(1520,3335) ; v1(605,360) 680,360 R21.2@690,370 R15.2@690,450 ; v1(610,1075) 765,1075 v1(770,1080) 810,1120 865,1120 905,1080 v1(930,1080) ; R14.2@690,530 R15.2@690,450 ; v1(1085,695) 1085,690 1095,680 1095,475 1030,410 730,410 R15.2@690,450 ; v1(2600,3475) 2770,3475 2817,3428 R28.1@2817,3400 ; R25.1@2817,3340 R28.1@2817,3400 ; v5(2920,3485) 2985,3420 C61.1@2985,3400 ; v1(2950,630) 2950,715 3230,995 v1(3230,1245) ; C61.1@2985,3390 C61.1@2985,3400 ; v1(3115,3010) 3150,2975 3502.8,2975 3655,2822.8 3655,2630 3455,2430 v1(3455,2340) ; U18.1@3160,3450 U18.2@3160,3400 C61.1@2985,3400 ; R28.1@2817,3400 2827,3390 C60.1@2905,3390 2915,3400 C61.1@2985,3400
  Bottom Layer w8: v1(45,3470) 45,3390 ; R13.1@200,3055 200,3210 R5.2@195,3215 195,3235 215,3255 ; R10.2@210,3365 160,3415 70,3415 45,3390 ; U4.31@460.71,3175.75 460.71,3135.51 449.2,3124 406.2,3124 275.2,3255 215,3255 ; v1(605,360) 605,375 679.68,449.68 679.68,512.61 670,522.3 670,525.71 U6.31@634.25,525.71 ; R11.2@610,1015 610,1070 v1(610,1075) ; R12.2@690,1015 690,1075 v1(690,1080) ; R7.2@770,1015 770,1075 v1(770,1080) ; v1(930,1080) 925,1080 930,1075 R8.2@930,1015 R22.2@1010,1015 1080,945 1080,815 ; U5.31@999.29,684.25 999.29,829.29 1015,845 1050,845 1080,815 ; v1@1080,700 1080,815 ; v1(1085,695) 1500,280 1630,280 1675.47,234.53 1701.37,234.53 1724.53,211.37 1724.53,195.47 1775,145 2070,145 2155,60 2920,60 3005,145 3005,575 v1(2950,630) ; v1(1520,3335) 1525,3335 1525,3340 1625,3440 2565,3440 v1(2600,3475) ; C64.1@2905,3390 C65.1@2985,3390 ; v5(2920,3485) 2985,3420 C65.1@2985,3390 ; v1(3115,3010) 3115,3280 3160,3325 U19.2@3160,3350 3105,3350 C66.1@3065,3390 C65.1@2985,3390 ; v1(3230,1245) 3517.5,1532.5 3517.5,1736.39 3545,1763.89 3545,2155 3490,2210 3490,2305 v1(3455,2340) ; 45,3390 45,3305 65,3285 120,3285 150,3255 215,3255
VCC3.3D: 1.1 C1.1 C2.1 C3.1 C4.1 C5.1 C6.1 C7.1 C8.1 C9.1 C20.1 C21.2 C22.2 C23.2 C24.2 C25.2 C26.2 C27.2 C28.2 C29.2 C30.2 C31.2 C32.2 C33.2 C34.2 C35.2 C36.2 C37.2 C38.2 C39.2 C44.2 C50.1 C53.1 C56.1 D2.1 L5.1 P7.4 P100.4 R1.2 R2.1 R3.1 R23.2 R25.2 R27.2 R28.2 R29.2 R31.2 R33.2 R34.2 R37.1 R38.1 R39.1 R41.2 R43.2 R44.2 R52.2 R53.2 R54.2 R86.2 U1.1 U1.3 U1.9 U1.14 U1.27 U1.43 U1.49 U2.11 U7.15 U7.23 U7.36 U7.49 U7.62 U7.72 U7.82 U7.91 U7.103 U7.114 U7.127 U7.136 U7.149 U7.159 U7.172 U8.3 U8.7 U8.8 U9.1 U10.8 U13.1 U14.16 U15.3 U16.9 U17.1 U17.8 | length 10549.8
  Top Layer w8: v1(80,3010) 85,3010 L5.1@85,2935 ; C56.1@85,2847 L5.1@85,2935 ; 1.1@90,3135 R34.2@200,3135 ; U16.9@444.84,2818.43 444.84,2936.84 ; C53.1@457,2990 457,2949 444.84,2936.84 ; U17.1@910,3380 U17.8@1130,3380 v1(1225,3380) ; v1(1120,2435) 1137.36,2417.64 U7.15@1266.3,2417.64 ; v1(1150,1990) 1164.25,2004.25 U7.36@1266.3,2004.25 ; v1(1150,2270) 1150,2275 1155,2280 1174.84,2260.16 U7.23@1266.3,2260.16 ; U1.27@1161.1,965 U1.27@1166.1,960 1166.1,1023.9 v2(1165,1025) ; v1(1405,3175) 1400,3180 R54.2@1400,3235 R53.2@1400,3315 R52.2@1400,3395 1400,3460 C50.1@1420,3480 ; v1(1410,1885) 1420,1885 1455,1850 1455,1825 1440.51,1810.51 U7.49@1440.51,1751.3 ; U7.172@1440.51,2788.7 1440.51,2890.51 v1(1455,2905) ; v1(1475,865) 1480,865 1505,890 1550,890 1575.55,915.55 U1.14@1575.55,960 1575.55,1047.45 C9.1@1555,1068 ; C7.1@1637,365 1637,412 v2(1640,415) 1638.54,416.46 U1.43@1638.54,487.56 ; C5.1@1650,1068 1658,1068 1695,1105 1757.5,1105 1795,1067.5 ; v1(1695,1840) 1695.12,1839.88 1695.12,1750 U7.62@1696.42,1751.3 ; U7.159@1696.42,2788.7 1696.42,2896.42 1705,2905 v1(1705,2895) ; U1.9@1733.03,960 1733.03,1003.03 1750,1020 1750,1055 1762.5,1067.5 1795,1067.5 ; U1.49@1827.52,487.56 1827.52,422.52 1825,420 v1(1830,415) ; v1(1890,1855) 1895,1855 1893.27,1853.27 U7.72@1893.27,1751.3 ; U7.149@1893.27,2788.7 1893.27,2903.27 1900,2910 1900,2900 v1(1905,2895) ; U1.3@1922.01,960 1922.01,1007.99 ; C3.1@1960,1058 v1(1922,1058) 1922.01,1007.99 ; U1.1@1985,960 2010,985 v2(2015,980) 2022.5,987.5 2105.5,987.5 C4.1@2108,985 ; v2(2045,850) 2065,870 2103,870 C2.1@2105,868 C1.1@2165,868 ; v1(2060,1835) 2060,1830 2090.12,1799.88 U7.82@2090.12,1751.3 ; R1.2@2115,1155 v1(2205,1155) ; U7.136@2149.17,2788.7 2149.17,2889.17 2160,2900 v1(2160,2895) ; v1(2185,2595) 2185.2,2594.8 U7.127@2303.7,2594.8 ; v1(2210,2120) 2207.64,2122.36 U7.103@2303.7,2122.36 ; v1(2220,2338.9) U7.114@2303.7,2338.9 ; U7.91@2303.7,1886.14 2371.14,1886.14 2400,1915 2435,1915 v1(2460,1890) ; P7.4@2600,3095 2672.56,3095 R23.2@2690.06,3077.5 2737.5,3077.5 v1(2740,3080) ; v1(2705,3380) 2744.94,3340.06 R25.2@2762.5,3340.06 R28.2@2762.5,3400.06 2732.56,3430 2705,3430 v1(2705,3435) ; v1(2850,2545) 2905,2545 v1(2915,2555) ; v1(3270,2580) 3300,2610 C38.2@3335,2610 ; L5.1@85,2935 135,2985 360,2985 408.16,2936.84 444.84,2936.84 ; 1795,1067.5 1862.5,1067.5 1922.01,1007.99
  Top Layer w25: C39.2@3090,475 3055,475 3040,460 3040,270 v1(3100,210)
  Bottom Layer w8: v1(815,3125) D2.1@910,3125 ; v1(1010,3205) 1005,3200 995,3200 970,3225 970,3275 982.5,3287.5 982.5,3344.93 1102.57,3465 C44.2@1135,3465 ; v1(1120,2435) 1150,2405 C35.2@1255.63,2405 ; U15.3@1130,3280 1230,3280 1260,3310 1260,3355 1235,3380 v1(1225,3380) ; v1(1150,1990) 1220,2060 1277.56,2060 R31.2@1302.5,2035.06 ; v1(1150,2270) 1150,2280 1160,2270 C34.2@1245.63,2270 ; v2(1165,1025) 1195,995 C6.1@1195,977 ; v1(1410,1885) 1550,1885 v1@1589.94,1845.06 ; C33.2@1430,1744.37 1430,1770 1455,1795 1525,1795 1547.5,1817.5 R29.2@1547.5,1845.06 v1@1589.94,1845.06 ; C20.1@1432,2220.79 1392.5,2260.29 1392.5,2301.39 1425,2333.89 v1(1425,2340) U10.8@1508.5,2340 ; v1(1455,2905) 1484.94,2875.06 R33.2@1484.94,2847.5 ; R27.2@1457.5,2100.06 1546.94,2100.06 1560,2087 U8.8@1560,2065 U8.7@1560,2015 v1(1630,2015) ; v1(1480,2425) 1480.06,2424.94 C21.2@1527.5,2424.94 1527.5,2412.5 1555,2385 1725,2385 1755,2415 C37.2@1755,2435 ; v1(1590,1845) v1@1589.94,1845.06 ; v1(1695,1840) 1695,1774.37 C32.2@1700,1769.37 ; C30.2@1695,2809.37 1705,2819.37 v1(1705,2895) ; v1(1755,1970) 1760.06,1964.94 U8.3@1830,1964.94 ; v1(1830,415) C8.1@1888,415 ; C31.2@1885,1779.37 1890,1784.37 v1(1890,1855) ; v1(1900,2200) 1895,2200 1900,2195 1925,2195 U13.1@1975,2145 ; C36.2@1905,2804.37 v1(1905,2895) ; v2(2045,850) 2065.06,870.06 U2.11@2110.35,870.06 ; v1(2060,1835) R41.2@2060,1760 2075.63,1744.37 C22.2@2075.63,1695 ; C28.2@2115,2799.37 C27.2@2160,2799.37 v1(2160,2895) ; v1(2185,2595) 2265.63,2595 C26.2@2275.63,2605 ; v1(2210,2120) 2275.63,2120 C24.2@2280.63,2115 ; v1@2210,2340 2280.63,2340 C25.2@2285.63,2345 C29.2@2285.63,2300 ; C23.2@2375,1964.37 2385.63,1964.37 v1(2460,1890) ; R3.1@2465,1135 v1(2465,1310) ; v1(2665,540) R2.1@2720,540 ; v1(2850,2545) 2845,2550 2845,2545 2915,2475 R39.1@2965,2475 ; v1(2895,2695) 2895,2655 2915,2635 R37.1@2965,2635 ; v1(2915,2555) 2910,2555 R38.1@2965,2555 ; R43.2@2965,2715 R44.2@2965,2795 R86.2@2965,2875 v1(2965,2935) ; v1(3100,210) U14.16@3100,280 ; P100.4@3175,2606.61 3243.39,2606.61 v1(3270,2580)
VCC3.3E: C45.1 C54.1 C55.1 C57.1 EARTHNET1.4 EARTHNET1.5 L5.2 R47.1 R48.1 R49.1 R50.1 U16.1 U16.19 | length 2383
  Top Layer w8: L5.2@175,2935 215,2935 v1(260,2890) 212,2842 C57.1@185,2842 ; v1@220,2550 252,2582 C55.1@275,2582 346.21,2582 U16.19@385.79,2621.57 ; U16.1@533.43,2670.79 539.21,2670.79 v1(580,2630) ; EARTHNET1.4@680,2115.2 735.2,2115.2 795,2175 v1(795,2350)
  Bottom Layer w8: v1@220,2550 252,2582 ; C45.1@237,2825 237,2867 v1(260,2890) 260,2935 275,2950 365,2950 387.5,2927.5 387.5,2878.61 366.39,2857.5 323.61,2857.5 307.5,2841.39 307.5,2818.61 330,2796.11 330,2660 252,2582 ; EARTHNET1.5@580,2065.2 630,2115.2 EARTHNET1.4@680,2115.2 ; v1(580,2630) 580,2625 579.87,2624.87 C54.1@579.87,2582 ; v1(795,2350) 795,2435 648,2582 C54.1@579.87,2582 ; 252,2582 R48.1@330,2582 R47.1@390,2582 R50.1@450,2582 R49.1@510,2582 C54.1@579.87,2582
  other v1: 230,2550
VCC5V: C10.1 C63.1 C70.1 C73.2 C74.2 C75.2 C78.2 J1.1 J1.2 P9.1 P9.2 P9.3 P16.2 P16.3 P16.4 P18.2 R6.2 R16.2 R65.1 U4.27 U5.27 U6.27 U18.5 U18.8 U19.5 U19.8 U20.5 U20.8 U21.7 U22.2 U23.7 U24.3 U25.3 XC1.1 XC2.1 | length 15052.6
  Top Layer w8: v1(130,3060) 325,3060 v1(335,3070) ; v1(190,865) 190,895 240,945 U21.7@290,945 ; C78.2@425,1435 v1(487.5,1435) XC2.1@550,1435 ; v1(550,1730) 555,1730 500,1675 v1(500,1640) 500,1590 517.2,1572.8 U25.3@558.66,1572.8 ; U22.2@610,1230 705,1230 C70.1@715,1240 v1(715,1180) ; v1(730,765) 730,800 770,840 782.5,827.5 847.5,827.5 v1(885,790) ; v1@740,765 740,625 R16.2@755,610
  Top Layer w10: U20.5@3380,3075 3335,3075 3315,3095 3315,3200 3327.5,3212.5 ; U20.8@3380,3225 3340,3225 3327.5,3212.5 ; U18.5@3380,3300 3340,3300 3325,3315 3325,3215 3327.5,3212.5 ; v1(3575,3500) 3650,3575 3650,3615
  Top Layer w20: v1(885,790) 910,765 1062.38,765 1165,662.38 v1(1165,655)
  Top Layer w25: v1(3425,2270) 3430,2265 3692.5,2265 3705,2277.5 v1(3705,2425)
  Top Layer w30: U18.5@3380,3300 3570,3300 3585,3285
  Top Layer w50: v8(2950,175) 2950,510 3297.5,857.5 P9.2@3405.5,857.5 ; P18.2@3165,3695 3165,3697.9 3222.63,3755.53 3334.47,3755.53 P16.4@3395,3695 P16.3@3495,3695 3570,3695 3650,3615 3700,3565 3700,3335 3650,3285 3585,3285 3545,3245 C63.1@3545,3115 ; U18.8@3400,3460 3325,3460 3300,3435 3300,3090 3330,3060 3490,3060 C63.1@3545,3115 ; v1(3545,3060) C63.1@3545,3115
  Bottom Layer w8: v1(130,3060) 80,3060 35,3015 35,1780 85,1730 v1(550,1730) ; v1(155,1125) 185,1125 C73.2@215,1155 ; v1(335,3070) 345,3060 488.9,3060 539.45,3110.55 ; XC1.1@425,1435 C75.2@550,1435 ; v1(487.5,1435) 487.5,1512.5 522.2,1547.2 U24.3@558.66,1547.2 ; v1(500,1640) v1@500,1650 ; U4.27@539.45,3175.75 539.45,3110.55 ; U23.7@610,1230 705,1230 C74.2@715,1240 v1@715,1175 ; U6.27@634.25,604.45 681.46,604.45 740,662.99 740,745 v1@730,755 ; R6.2@670,3075 575,3075 539.45,3110.55 ; v1@880,800 920.55,759.45 U5.27@920.55,684.25 ; v1(3425,2270) 3476,2219 3476,2162.89 C10.1@3482,2156.89
  Bottom Layer w10: U19.8@3380,3300 3335,3300 3320,3315 3320,3425 3345,3450 U19.5@3380,3450 3525,3450 v1(3575,3500)
  Bottom Layer w20: U23.7@610,1230 565,1230 430,1095 430,1040 705,765 v1(730,765) ; v1@1165,660 1525,300 ; 1530,300 1655,300 1695,260 2005,260 2175,90 2865,90 v8(2950,175)
  Bottom Layer w50: 3405,845 3600,845 3705,950 v1(3705,2425) 3705,2900 v1(3545,3060) 3545,3110 3570,3135 R65.1@3690,3135
  other v1: 3360,825 3445,825 3405,875 3490,3015 3595,3065
Vcm: C71.1 R74.2 U24.2 U25.2 | length 775.8
  Top Layer w8: v1(455,1495) 455,1525 477.2,1547.2 U25.2@558.66,1547.2
  Bottom Layer w8: R74.2@280,1235 280,1250 C71.1@215,1315 170,1360 170,1390 255,1475 425,1475 465,1515 465.73,1515 525.73,1575
VDDA: C16.2 C17.2 R31.1 U7.39 | length 377.2
  Top Layer w8: U7.39@1266.3,1945.2 1349.8,1945.2 v1(1355,1940)
  Bottom Layer w8: R31.1@1248,2035 1248,1915.44 C16.2@1247.5,1914.94 1277.44,1885 1340,1885 1355,1900 v1(1355,1940)
VREF+: C72.2 R75.1 U7.38 U22.6 | length 1614.9
  Top Layer w8: C72.2@215,1155 280,1220 R75.1@280,1235 325,1280 U22.6@390,1280 460,1280 v1(495,1315) ; v1@815,1910 838.83,1933.83 1178.94,1933.83 1210,1964.88 U7.38@1266.3,1964.88
  Bottom Layer w8: v1(495,1315) 550,1370 670,1370 750,1450 750,1455.2 779,1484.2 779,1549 780,1550 780,1740 799,1759 v1@799,1894 ; v1@807.5,1902.5 v1@815,1910
  other v1: 805,1905
pads on no net: EARTHNET1.7 P1.46 P1.48 P1.50 P5.34 P5.36 P5.38 P5.40 P9.0 P9.4 P9.7 P50.4 P50.6 P50.7 P50.8 P50.9 P50.MH1 P50.MH2 P100.10 P100.11 P100.12 P100.13 U1.40 U2.12 U2.33 U3.1 U3.2 U3.3 U3.4 U3.5 U3.6 U3.10 U3.11 U3.14 U3.15 U3.20 U3.21 U3.22 U3.23 U3.24 U3.25 U3.34 U3.35 U3.38 U3.39 U3.48 U4.33 U5.33 U6.10 U6.11 U6.33 U10.9 U16.10 U21.1 U21.5 U21.8 U22.1 U22.3 U22.5 U22.7 U23.1 U23.5 U23.8 U24.7 U25.7 X1.
copper on no net:
  other v3: 906.77,526.77 950.08,526.77 993.39,526.77 476.77,531.61 520.08,531.61 563.39,531.61 906.77,570.08 950.08,570.08 993.39,570.08 476.77,574.92 520.08,574.92 563.39,574.92 906.77,613.39 950.08,613.39 993.39,613.39 476.77,618.23 520.08,618.23 563.39,618.23 466.61,3246.61 509.92,3246.61 553.23,3246.61 466.61,3289.92 509.92,3289.92 553.23,3289.92 466.61,3333.23 509.92,3333.23 553.23,3333.23
  other v4: 3595,290 3595,490 1125,1325 2460,2925 3465,3560
  other v6: 2300,260 115,2510

## Polygon pours and split planes (outlines as drawn)
DGND on DGND (split plane): 3749.9,20.1 20.1,20.1 20.1,789.02 20.29,788.05 21.4,786.4 23.05,785.29 25,784.9 560,784.9 561.95,785.29 563.6,786.4 573.6,796.4 574.71,798.05 575.1,800 575.1,1099.9 805,1099.9 806.95,1100.29 808.6,1101.4 809.71,1103.05 810.1,1105 810.1,1665 809.71,1666.95 808.6,1668.6 773.6,1703.6 771.95,1704.71 770,1705.1 30,1705.1 28.05,1704.71 27.5,1704.34 26.95,1704.71 25,1705.1 23.05,1704.71 21.4,1703.6 20.29,1701.95 20.1,1700.98 20.1,3779.9 3749.9,3779.9
AGND on DGND (split plane): 799.9,1662.89 799.9,1110.1 575,1110.1 573.05,1109.71 572.5,1109.34 571.95,1109.71 570,1110.1 568.05,1109.71 566.4,1108.6 565.29,1106.95 564.9,1105 564.9,802.11 557.89,795.1 30.1,795.1 30.1,1694.9 767.89,1694.9
VCC3.3D on VCC (split plane): 3749.9,20.1 20.1,20.1 20.1,789.02 20.29,788.05 21.4,786.4 23.05,785.29 25,784.9 560,784.9 561.95,785.29 563.6,786.4 573.6,796.4 574.71,798.05 575.1,800 575.1,1099.9 810,1099.9 811.95,1100.29 813.6,1101.4 814.71,1103.05 815.1,1105 815.1,1675 814.71,1676.95 813.6,1678.6 811.95,1679.71 810,1680.1 30,1680.1 28.05,1679.71 26.4,1678.6 21.4,1673.6 20.29,1671.95 20.1,1670.98 20.1,3779.9 3749.9,3779.9
VCC5V on VCC (split plane): 804.9,1110.1 570,1110.1 568.05,1109.71 566.4,1108.6 565.29,1106.95 564.9,1105 564.9,802.11 557.89,795.1 30.1,795.1 30.1,1667.89 32.11,1669.9 804.9,1669.9
VCC3.3 on VCC (split plane): 3439.9,3517.89 3439.9,2975.1 2822.11,2975.1 2795.1,3002.11 2795.1,3517.89 2802.11,3524.9 3432.89,3524.9

## Keep-outs
Keep-Out Layer:
  lines w10: 0,3800 0,2905 0,600 0,0 420,0 ; 0,3800 0,3800 ; 0,3800 3770,3800 ; 420,0 3770,0 3770,3800 ; 420,0 420,0 ; 3770,3800 3770,3800

## Other copper
Top Layer:
  rectangle net VCC5V: 3345,790 3460,910
  rectangle net VCC5V: 3470,2990 3620,3155
Bottom Layer:
  rectangle net VCC5V: 3345,790 3460,910
  rectangle net VCC5V: 3470,2990 3620,3155
DGND (plane layer: these items are gaps in the copper):
  lines w10: 25,1700 25,790 560,790 570,800 570,1105 ; 30,1700 770,1700 805,1665 805,1105 575,1105
VCC (plane layer: these items are gaps in the copper):
  lines w10: 25,790 555,790 560,790 570,800 570,1105 800,1105 810,1105 810,1675 30,1675 25,1670 25,790 ; 2790,3000 2790,3520 2800,3530 3435,3530 3445,3520 3445,2970 2820,2970 2790,3000

## Silkscreen, mask and mechanical layers (free items; w line width, h text height)
Top Overlay:
  text "+" at 55,3025 h60
  text "H743" at 2360,140 h60
  text "2018.11.3V1.0.0" at 2215,55 h60
Mechanical 1:
  the board outline again, w10

## Text inside footprints (layer, text, board x,y; h text height)
J1: Top Overlay "40" at 3405,1515 h30 r270; Top Overlay "1" at 3425,2310 h30 r270
P1: Top Overlay "2" at -15,3710 h50; Top Overlay "1" at -15,3610 h50; Top Overlay "49" at 2560,3595 h50; Top Overlay "50" at 2565,3710 h50
P5: Top Overlay "1" at -5,70 h50; Top Overlay "2" at -15,195 h50; Top Overlay "40" at 2060,175 h50; Top Overlay "39" at 2065,70 h50
U7: Top Overlay "132" at 2235,2765 h48.82; Top Overlay "88" at 2260,1730 h48.82; Top Overlay "44" at 1230,1730 h48.82; Top Overlay "1" at 1225,2735 h48.82